# Altium PCB ST7735_Extend.PcbDoc
Units mm, origin at the board's own origin, x right, y up, seen from the top; angles counter-clockwise.
Board outline 18.29 x 30.99 mm, 2 copper layers (Top Layer, Bottom Layer); 13 components, 11 nets, 61 pads, 54 vias.
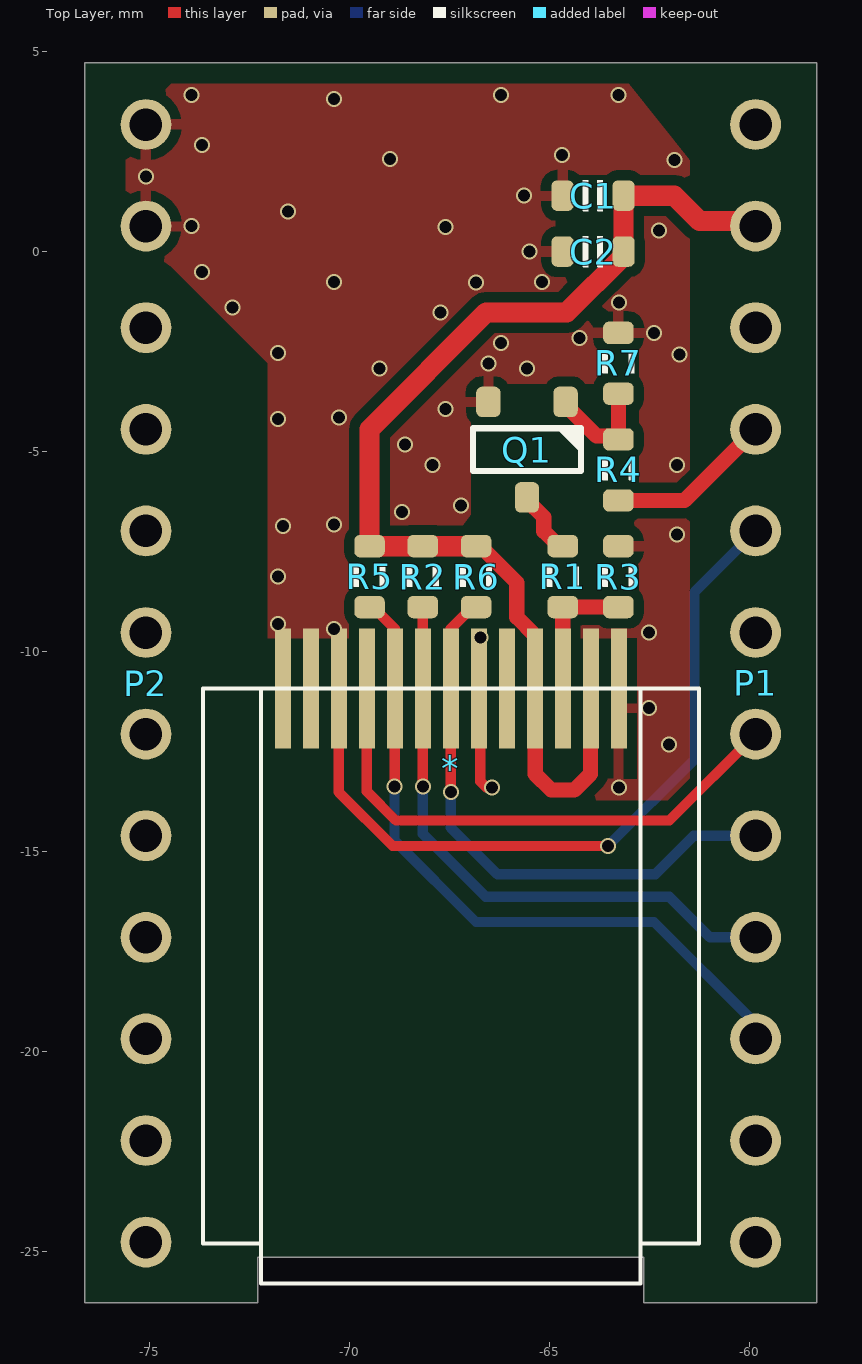
[diagram p0: Top Layer view]
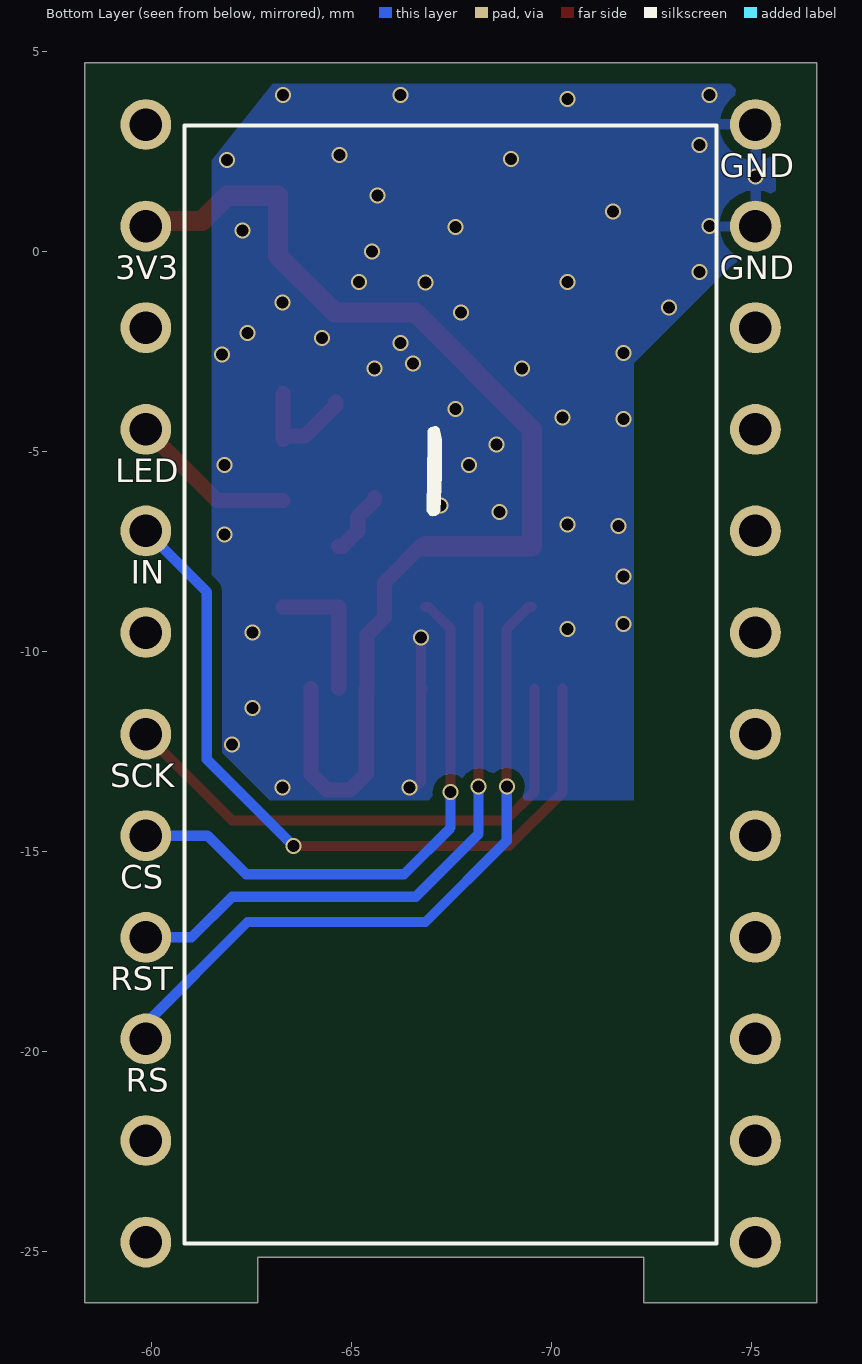
[diagram p1: Bottom Layer view, seen from below]
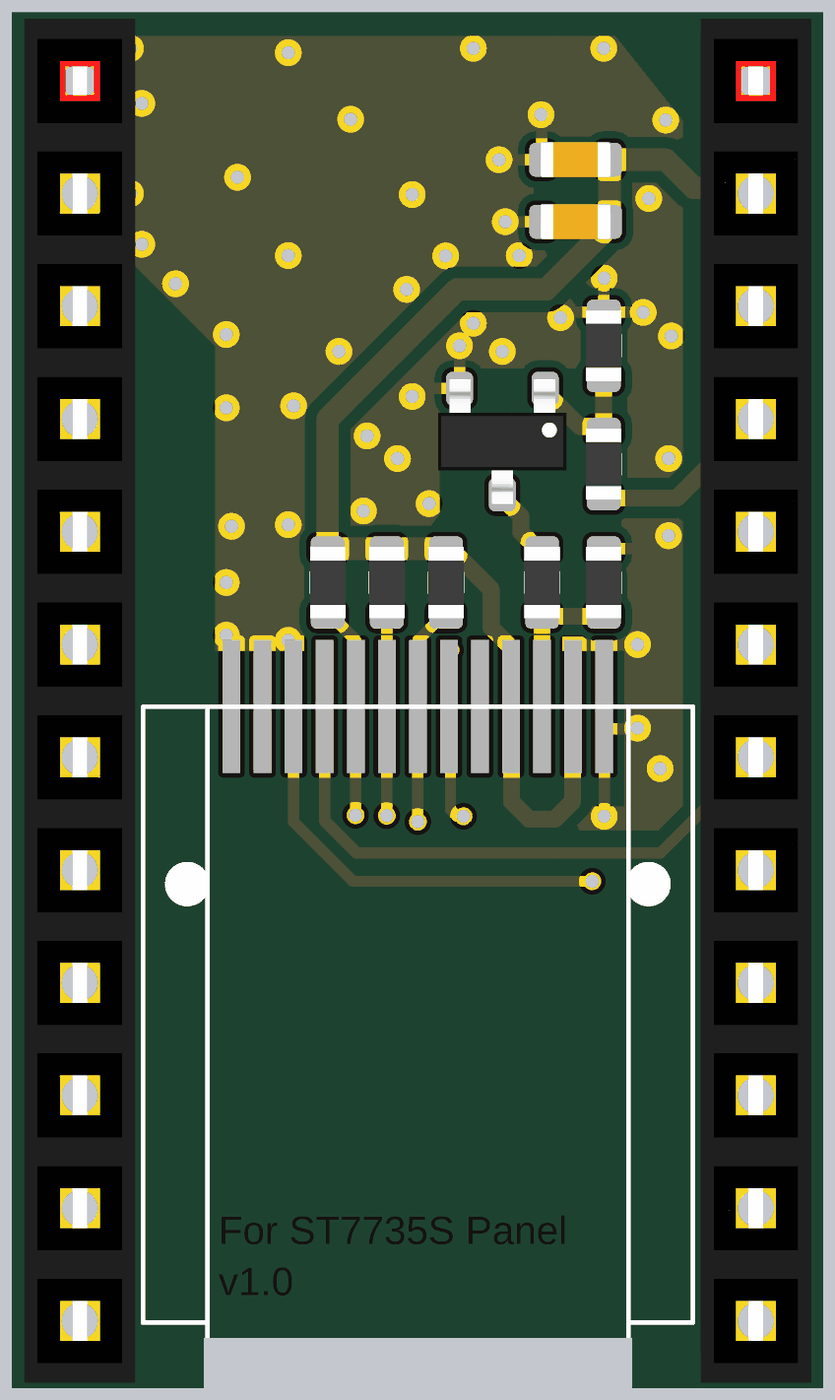
[diagram p2: 3D render of the assembled board from above, using the file's embedded part models]

## Layer stack, top to bottom
Top Solder: solder mask 0.0102, Solder Resist, Dk 3.5
Top Layer: signal copper 0.0356
Dielectric 1: dielectric 0.32, FR-4, Dk 4.8
Bottom Layer: signal copper 0.0356
Bottom Solder: solder mask 0.0102, Solder Resist, Dk 3.5

## Board outline
-76.618,-26.266 -76.618,4.724 -58.328,4.724 -58.328,-26.266 -62.645,-26.266 -62.645,-25.137 -72.297,-25.137 -72.297,-26.266

## Design rules (kind name [scope] priority, off if disabled: settings)
Clearance [All] p1: gap=0.254 ignorepadtopadclearanceinfootprint=FALSE except(0: Arc-Hole Track-Hole SMDPad-Hole THPad-Hole Via-Hole Fill-Hole Poly-Hole Region-Hole Text-Hole)
PolygonConnect PolygonConnect_1 [All vs IsVia] p1: connectstyle=Direct reliefconductorwidth=0.254 reliefentries=4 polygonreliefangle="90 Angle" airgapwidth=0.254
PolygonConnect [All] p2: connectstyle=Relief reliefconductorwidth=0.254 reliefentries=4 polygonreliefangle="90 Angle" airgapwidth=0.254
RoutingVias [All] p1: holewidth=0.711 width=1.27 viastyle="Through Hole" minholewidth=0.711 minwidth=1.27 maxholewidth=0.711 maxwidth=1.27
SolderMaskExpansion [All] p1: expansion=0.102
Width [All] p1: maxlimit=1.27 minlimit=0.254 preferedwidth=0.254
30 further rules are at their usual default settings.

## Components (designator, comment, footprint, x,y, rotation, side; value= is the part's Value field where it differs from the comment)
* "LH096T-IG01" LH096T-IG01 -67.471,-10.913 r270 bottom locked
C1 "C0603" CAP_0603 -63.915,1.406 r0 top value=10UF
C2 "C0603" CAP_0603 -63.915,0.009 r0 top value=0.1UF
P1 "HDR1x12_2.54" HDR1X12_2.54_180F -59.851,3.184 r0 top locked
P2 "HDR1x12_2.54" HDR1X12_2.54_180F -75.091,3.184 r0 top locked
Q1 "2N2222" SOT23-3 -65.566,-4.944 r270 top
R1 "R0603" RES_0603 -64.671,-8.119 r270 top value=22R
R2 "R0603" RES_0603 -68.171,-8.119 r270 top value=10K
R3 "R0603" RES_0603 -63.28,-8.119 r270 top value=10R
R4 "R0603" RES_0603 -63.28,-5.452 r90 top value=1K
R5 "R0603" RES_0603 -69.503,-8.119 r270 top value=10K
R6 "R0603" RES_0603 -66.836,-8.119 r270 top value=10K
R7 "R0603" RES_0603 -63.28,-2.785 r270 top value=10K

## Footprints (in the part's own frame and the unit in brackets; to place one, negate y for a bottom-side part, rotate by r counter-clockwise, add the part's x,y. Pads: shape width x height; smd on the part's side, far side on the other; paste and mask are expansions set on the pad)
CAP_0603 [mil]
  rrect50% 22x30 smd: 1(-30,0) 2(30,0)
  silkscreen extent -10,-15 10,15, body extent -31,-16 31,16, height 31
HDR1X12_2.54_180F [mil]
  round 50 hole 32: 1(0,0) 2(0,-100) 3(0,-200) 4(0,-300) 5(0,-400) 6(0,-500) 7(0,-600) 8(0,-700) 9(0,-800) 10(0,-900) 11(0,-1000) 12(0,-1100)
  body extent -49,-1155 49,55, height 335
LH096T-IG01 [mm]
  rect 3x0.4 smd far side: 0(0,4.2) 1(0,3.5) 2(0,2.8) 3(0,2.1) 4(0,1.4) 5(0,0.7) 6(0,0) 7(0,-0.7) 8(0,-1.4) 9(0,-2.1) 10(0,-2.8) 11(0,-3.5) 12(0,-4.2)
  round 1 on Top Overlay: $(4,-5.2) $(4,5.2)
  silkscreen extent -14.07,-6.65 13.88,6.65, body extent -14.07,-6.65 13.88,6.65, height 0.25
RES_0603 [mil]
  rrect50% 22x30 smd: 1(-30,0) 2(30,0)
  silkscreen extent -10,-16 10,16, body extent -31,-16 31,16, height 18
SOT23-3 [mil]
  rrect50% 30x24 smd: 1(-47,38) 2(-47,-38) 3(47,0)
  silkscreen extent -21,-53 21,53, body extent -55,-57 55,57, height 51

## Part data
C1 C2: library part Cap_0603, "Capacitor", Specification="X7R 50V", Type=0603
P1 P2: "Header"
Q1: library part BJT_NPN, "Transistor", Type=NPN
R1 R2 R3 R4 R5 R6 R7: library part Res_0603, "Resistor", Specification=±5%, Type=0603

## Free pads (board coordinates)
  round 1.905 on Bottom Overlay mask+0.025: ""(-65.522,-5.733)

## Via types
v1: diameter 0.4, hole 0.3, Top Layer to Bottom Layer, 54 vias

## Nets (pads, with @x,y where several pads share a name; then routed paths per layer and width w, separated by ;. In a path a pad name is that pad's centre, name@x,y a point inside that pad or via, vN(x,y) a via of type N, cw(c..) or ccw(c..) an arc to the next point about the centre after c; other vN are vias at no path point)
3V3: *.9 *.11 C1.2 C2.2 P1.2 R2.1 R5.1 R6.1 | length 29.1
  Top Layer w0.381: R6.1 -66.734,-7.357 -65.82,-8.271 -65.82,-9.135 -65.381,-9.575 -65.381,-10.904 *.9 -65.362,-10.923 -65.362,-13.051 -64.96,-13.453 -64.382,-13.453 -63.981,-13.051 -63.981,-10.923 *.11
  Top Layer w0.508: R6.1 R2.1 R5.1 -69.503,-4.436 -66.582,-1.515 -64.575,-1.515 -63.153,-0.093 C2.2 C1.2 -61.883,1.406 -61.248,0.771 -59.978,0.771 P1.2
CS: *.6 P1.8 R6.2 | length 14.5
  Top Layer w0.254: v1(-67.471,-13.507) *.6 -67.471,-9.421 -66.931,-8.881 R6.2 ; P1.8@-59.978,-14.723 P1.8
  Bottom Layer w0.254: v1(-67.471,-13.507) -67.471,-14.394 -66.307,-15.558 -62.358,-15.558 -61.396,-14.596 P1.8
GND: *.7 *.12 C1.1 C2.1 P2.1 P2.2 Q1.2 R3.1 R7.1 | length 4
  Top Layer w0.254: v1(-66.734,-9.643) -66.734,-10.876 *.7 -66.734,-10.95 -66.734,-13.236 -66.586,-13.385 v1(-66.441,-13.385)
  other v1: -63.271,-13.385 -62.01,-12.31 -62.518,-11.398 -62.518,-9.516 -70.392,-9.422 -71.789,-9.305 -71.789,-8.119 -61.82,-7.064 -71.671,-6.852 -70.392,-6.816 -68.696,-6.507 -67.217,-6.341 -67.93,-5.325 -61.817,-5.325 -68.614,-4.817 -71.789,-4.182 -70.271,-4.137 -67.598,-3.928 -69.249,-2.912 -65.566,-2.912 -66.531,-2.785 -61.756,-2.564 -71.789,-2.531 -66.22,-2.277 -64.253,-2.15 -62.391,-2.033 -67.725,-1.515 -72.932,-1.388 -63.271,-1.261 -70.392,-0.753 -66.842,-0.761 -65.185,-0.753 -73.694,-0.499 -65.5,0.01 -62.264,0.534 -73.948,0.644 -67.598,0.621 -71.535,1.011 -65.64,1.406 -75.091,1.885 -68.985,2.318 -61.883,2.301 -64.694,2.422 -73.694,2.676 -70.392,3.819 -73.948,3.916 -66.22,3.916 -63.28,3.916
LED: P1.4 R4.1 | length 4.2
  Top Layer w0.381: R4.1 -61.629,-6.214 P1.4
MOSI: *.2 P1.5 | length 19.3
  Top Layer w0.254: *.2 -70.271,-13.507 -68.928,-14.85 v1(-63.539,-14.85)
  Bottom Layer w0.254: v1(-63.539,-14.85) -61.375,-12.686 -61.375,-8.5 P1.5
Net*_10: *.10 R1.2 R3.2 | length 3.4
  Top Layer w0.381: *.10 R1.2 R3.2
NetQ1_1: Q1.1 R4.2 R7.2 | length 2.9
  Top Layer w0.381: Q1.1 -64.601,-3.826 -63.826,-4.601 -63.369,-4.601 R4.2 R7.2
NetQ1_3: Q1.3 R1.1 | length 1.6
  Top Layer w0.381: Q1.3 -65.566,-6.214 -65.147,-6.633 -65.147,-6.983 -64.773,-7.357 R1.1
RESET: *.5 P1.9 R2.2 | length 15.1
  Top Layer w0.254: v1(-68.171,-13.372) *.5 R2.2
  Bottom Layer w0.254: v1(-68.171,-13.372) -68.171,-14.549 -66.6,-16.12 -62.01,-16.12 -60.994,-17.136 P1.9
RS: *.4 P1.10 R5.2 | length 17.5
  Top Layer w0.254: R5.2 -69.408,-8.881 -68.871,-9.418 *.4 -68.871,-13.357 v1(-68.876,-13.362)
  Bottom Layer w0.254: v1(-68.876,-13.362) -68.876,-14.722 -66.842,-16.755 -62.391,-16.755 -59.851,-19.295 P1.10
SCK: *.3 P1.7 | length 13.5
  Top Layer w0.254: *.3 -69.571,-13.488 -68.844,-14.215 -62.01,-14.215 P1.7
pads on no net: *.0 *.1 *.8 *.$ P1.1 P1.3 P1.6 P1.11 P1.12 P2.3 P2.4 P2.5 P2.6 P2.7 P2.8 P2.9 P2.10 P2.11 P2.12

## Polygon pours and split planes (outlines as drawn)
GND on Bottom Layer "Bottom Layer-GND" (solid, pour order 52): -74.456,4.2 -75.599,3.184 -75.599,0.39 -74.456,-0.372 -72.043,-2.785 -72.043,-13.707 -61.502,-13.707 -61.502,2.295 -63.026,4.2
GND on Top Layer "Top Layer-GND" (solid, pour order 54): -74.456,4.2 -75.599,3.184 -75.599,0.39 -74.456,-0.372 -72.043,-2.785 -72.043,-11.675 -70.011,-13.707 -61.502,-13.707 -61.502,2.295 -63.026,4.2

## Other copper
Top Layer:
  pour cut-out: -64.96,1.025
  pour cut-out: -64.384,1.931 -62.876,1.931 -62.876,-0.372 -64.384,-0.372
  pour cut-out: -70.028,-9.659 -70.028,-7.512 -70.028,-6.976 -67.235,-6.919 -66.977,-6.577 -66.977,-4.448 -66.977,-4.238 -66.586,-4.238 -66.531,-3.75 -66.071,-3.293 -64.931,-3.293 -63.805,-3.293 -63.805,-2.438 -62.755,-2.438 -62.755,-6.464 -63.575,-6.468 -63.56,-6.919 -63.539,-7.583 -63.528,-7.924 -62.755,-7.924 -62.755,-9.165 -64.296,-9.177 -64.296,-9.659

## Silkscreen, mask and mechanical layers (free items; w line width, h text height)
Bottom Overlay:
  region: -67.208,-6.472 -67.248,-5.588 -67.248,-4.693 -67.217,-4.509 -67.185,-4.415 -67.119,-4.36 -67.065,-4.355 -66.977,-4.386 -66.938,-4.412 -66.894,-4.456 -66.904,-4.691 -66.879,-6.487 -66.906,-6.54 -66.965,-6.599 -67.028,-6.614 -67.094,-6.599 -67.161,-6.556
  text "GND" at -74.202,1.66 h1.02
  text "GND" at -74.202,-0.88 h1.02
  text "3V3" at -59.089,-0.88 h1.02
  text "LED" at -59.089,-5.96 h1.02
  text "IN" at -59.47,-8.5 h1.02
  text "SCK" at -58.962,-13.58 h1.02
  text "CS" at -59.216,-16.12 h1.02
  text "RST" at -58.962,-18.66 h1.02
  text "RS" at -59.343,-21.2 h1.02
Top Solder:
  text "For ST7735S Panel" at -71.916,-23.486 h1.02
  text "v1.0" at -71.916,-24.248 h1.02
Mechanical 13:
  the board outline again, w0.127